# EAGLE board lixie_digit (EAGLE 7.6.0)
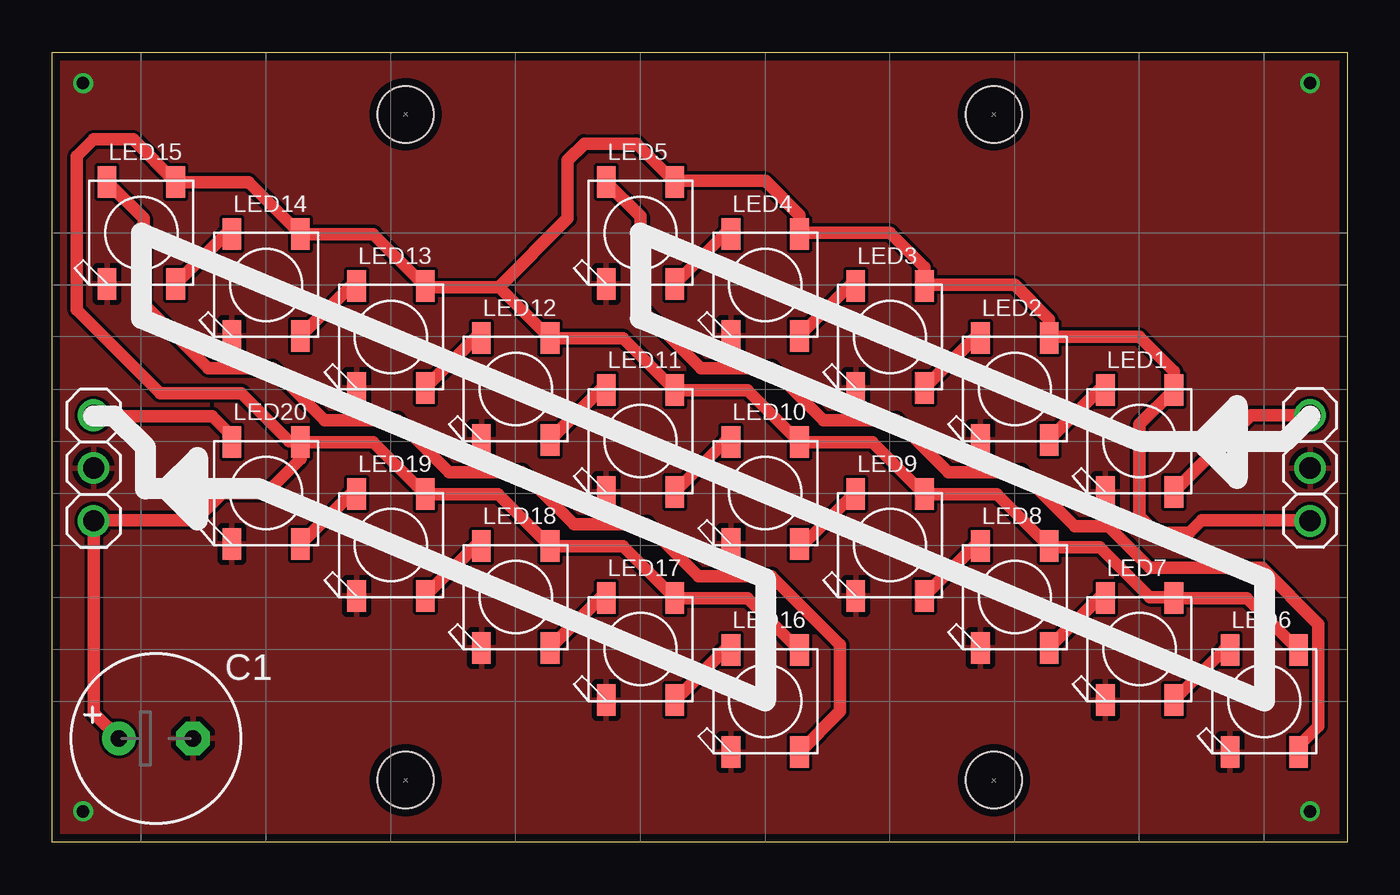
[diagram p0: board, top side]
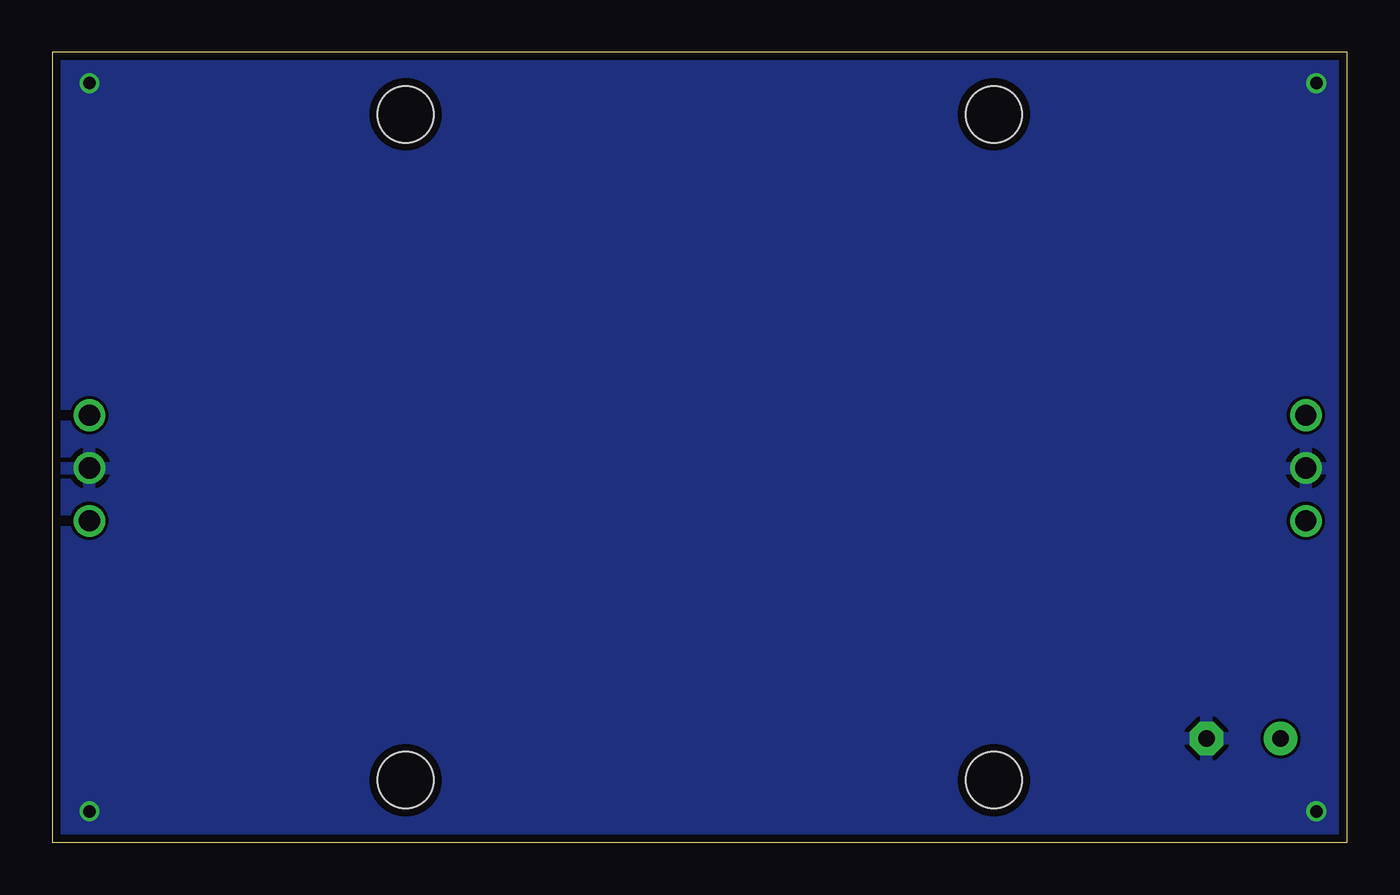
[diagram p1: board, bottom side, seen from below]

Size 62.3 x 38 mm. Coordinates in mm from the lower left corner, seen from the top.
Outline: 0,0 0,38 62.3,38 62.3,0 0,0
Copper layers (1*16): Top 0.0356mm / dielectric 1.5011mm / Bottom 0.0356mm
Design rules "LaenPCBOrder": minimum track width 6mil, minimum drill 13mil, track to track 6mil, track to pad 6mil, pad to pad 6mil, via to via 6mil, smd to smd 6mil, copper to edge 15mil, drill to drill 6mil, minimum pad ring 7mil, minimum via ring 7mil, stop-mask expansion 3mil, vias tented up to drill 0mil, thermal gap 10mil
Holes 2.7 mm at 17,35 45.3,35 45.3,3 17,3

## Footprints (pad centres in the part's own frame; a part is rotated, then mirrored left to right if it is on the bottom)
E3,5-8 = drill 0.813 pad 1.6: + -1.778,0 | drill 0.813 pad 1.6 octagon: - 1.778,0
1X03 = drill 1.016: 1 -2.54,0; 2 0,0; 3 2.54,0
WS2812B = smd 1.5 x 0.9: 1-VDD 2.45,-1.65; 2-DOUT 2.45,1.65; 3-GND -2.45,1.65; 4-DIN -2.45,-1.65

## Placement (x,y rotation side)
C1  [E3,5-8]  5,5 0 top
JP1  [1X03]  60.5,18 270 top
JP2  [1X03]  2,18 90 top
LED1  WS2812B5050  [WS2812B]  52.3,19.3 90 top
LED2  WS2812B5050  [WS2812B]  46.3,21.8 90 top
LED3  WS2812B5050  [WS2812B]  40.3,24.3 90 top
LED4  WS2812B5050  [WS2812B]  34.3,26.8 90 top
LED5  WS2812B5050  [WS2812B]  28.3,29.3 90 top
LED6  WS2812B5050  [WS2812B]  58.3,6.8 90 top
LED7  WS2812B5050  [WS2812B]  52.3,9.3 90 top
LED8  WS2812B5050  [WS2812B]  46.3,11.8 90 top
LED9  WS2812B5050  [WS2812B]  40.3,14.3 90 top
LED10  WS2812B5050  [WS2812B]  34.3,16.8 90 top
LED11  WS2812B5050  [WS2812B]  28.3,19.3 90 top
LED12  WS2812B5050  [WS2812B]  22.3,21.8 90 top
LED13  WS2812B5050  [WS2812B]  16.3,24.3 90 top
LED14  WS2812B5050  [WS2812B]  10.3,26.8 90 top
LED15  WS2812B5050  [WS2812B]  4.3,29.3 90 top
LED16  WS2812B5050  [WS2812B]  34.3,6.8 90 top
LED17  WS2812B5050  [WS2812B]  28.3,9.3 90 top
LED18  WS2812B5050  [WS2812B]  22.3,11.8 90 top
LED19  WS2812B5050  [WS2812B]  16.3,14.3 90 top
LED20  WS2812B5050  [WS2812B]  10.3,16.8 90 top

## Library data of the parts
C1 JP1 JP2 LED1-LED20 = adafruit

## Nets
GND: C1.- JP1.2 JP2.2 LED1.3-GND LED2.3-GND LED3.3-GND LED4.3-GND LED5.3-GND LED6.3-GND LED7.3-GND LED8.3-GND LED9.3-GND LED10.3-GND LED11.3-GND LED12.3-GND LED13.3-GND LED14.3-GND LED15.3-GND LED16.3-GND LED17.3-GND LED18.3-GND LED19.3-GND LED20.3-GND
N$1: LED1.2-DOUT LED2.4-DIN
N$2: LED2.2-DOUT LED3.4-DIN
N$3: LED3.2-DOUT LED4.4-DIN
N$4: LED4.2-DOUT LED5.4-DIN
N$5: LED5.2-DOUT LED6.4-DIN
N$6: LED6.2-DOUT LED7.4-DIN
N$7: LED7.2-DOUT LED8.4-DIN
N$8: LED8.2-DOUT LED9.4-DIN
N$9: LED9.2-DOUT LED10.4-DIN
N$10: LED10.2-DOUT LED11.4-DIN
N$11: LED11.2-DOUT LED12.4-DIN
N$12: LED12.2-DOUT LED13.4-DIN
N$13: LED13.2-DOUT LED14.4-DIN
N$14: LED14.2-DOUT LED15.4-DIN
N$15: LED15.2-DOUT LED16.4-DIN
N$16: LED16.2-DOUT LED17.4-DIN
N$17: LED17.2-DOUT LED18.4-DIN
N$18: LED18.2-DOUT LED19.4-DIN
N$19: LED19.2-DOUT LED20.4-DIN
N$20: C1.+ JP1.3 JP2.1 LED1.1-VDD LED2.1-VDD LED3.1-VDD LED4.1-VDD LED5.1-VDD LED6.1-VDD LED7.1-VDD LED8.1-VDD LED9.1-VDD LED10.1-VDD LED11.1-VDD LED12.1-VDD LED13.1-VDD LED14.1-VDD LED15.1-VDD LED16.1-VDD LED17.1-VDD LED18.1-VDD LED19.1-VDD LED20.1-VDD
N$23: JP1.1 LED1.4-DIN
N$24: JP2.3 LED20.2-DOUT

## Tracks (layer width: path | path; a pad name or v marks a point on that pad's centre or on a via)
GND  (via drill 0.6)
  other vias: 1.5,36.5 60.5,36.5 60.5,1.5 1.5,1.5
  pour Top: 63,-1 -1,-1 -1,39 63,39
  pour Bottom: -1.5,39.5 63.5,39.5 63.5,-1.5 -1.5,-1.5
N$1
  Top 0.61: LED1.2-DOUT 50.35,21.75 LED2.4-DIN
N$2
  Top 0.61: LED2.2-DOUT 44.35,24.25 LED3.4-DIN
N$3
  Top 0.61: LED3.2-DOUT 38.6,26.8 38.4,26.8 LED4.4-DIN
N$4
  Top 0.61: LED4.2-DOUT 32.35,29.25 LED5.4-DIN
N$5
  Top 0.61: LED5.2-DOUT 28.3,30.1 28.3,25.7 31.2,22.8 34.6,22.8 37.1,20.3 40.6,20.3 43.1,17.8 46.6,17.8 49.2,15.2 50.8,15.2 52.8,13.2 58.2,13.2 60.9,10.5 60.9,5.6 59.95,4.65 LED6.4-DIN
N$6
  Top 0.61: LED7.4-DIN 56.35,9.25 LED6.2-DOUT
N$7
  Top 0.61: LED8.4-DIN 50.35,11.75 LED7.2-DOUT
N$8
  Top 0.61: LED9.4-DIN 44.35,14.25 LED8.2-DOUT
N$9
  Top 0.61: LED10.4-DIN 36,14.3 36,14.2 38.55,16.75 LED9.2-DOUT
N$10
  Top 0.61: LED11.4-DIN 32.35,19.25 LED10.2-DOUT
N$11
  Top 0.61: LED12.4-DIN 26.35,21.75 LED11.2-DOUT
N$12
  Top 0.61: LED13.4-DIN 20.35,24.25 LED12.2-DOUT
N$13
  Top 0.61: LED14.4-DIN 14.35,26.75 LED13.2-DOUT
N$14
  Top 0.61: LED15.4-DIN 8.35,29.25 LED14.2-DOUT
N$15
  Top 0.61: LED15.2-DOUT 4.4,30 4.4,25.9 7.5,22.8 10.6,22.8 13.1,20.3 16.6,20.3 19.1,17.8 22.6,17.8 25.1,15.3 28.6,15.3 31.1,12.8 34.6,12.8 37.9,9.5 37.9,6.3 LED16.4-DIN
N$16
  Top 0.61: LED17.4-DIN 32.35,9.25 LED16.2-DOUT
N$17
  Top 0.61: LED18.4-DIN 26.35,11.75 LED17.2-DOUT
N$18
  Top 0.61: LED19.4-DIN 20.35,14.25 LED18.2-DOUT
N$19
  Top 0.61: LED20.4-DIN 14.35,16.75 LED19.2-DOUT
N$20
  Top 0.61: LED6.1-VDD 57.45,11.75 LED7.1-VDD 53.8,11.8 52.8,11.8 50.4,14.2 48,14.2 LED8.1-VDD 45.45,16.75 LED9.1-VDD 39.45,19.25 LED10.1-VDD 33.45,21.75 LED11.1-VDD 27.45,24.25 LED12.1-VDD 21.5,26.7 | 12.05,19.25 LED20.1-VDD 11.95,18.45 10.3,16.8 8.2,16.8 6.9,15.5 2.04,15.5 JP2.1 2,6.22 C1.+ | LED16.1-VDD 33.45,11.75 LED17.1-VDD 27.45,14.25 LED18.1-VDD 21.45,16.75 LED19.1-VDD 15.45,19.25 12.05,19.25 | 21.5,26.7 18,26.7 LED13.1-VDD 15.45,29.25 LED14.1-VDD 9.45,31.75 LED15.1-VDD 3.9,33.8 2,33.8 1.2,33 1.2,25.6 5.2,21.6 9.1,21.6 11.4,19.3 12,19.3 12.05,19.25 | 21.5,26.7 24.8,30 24.8,32.8 25.6,33.6 28.1,33.6 LED5.1-VDD 30,31.8 34.3,31.8 35.95,30.15 LED4.1-VDD 36,29.3 40.3,29.3 41.95,27.65 LED3.1-VDD 42,26.8 46.3,26.8 47.95,25.15 LED2.1-VDD 48,24.3 52.3,24.3 53.95,22.65 LED1.1-VDD 52.3,20.1 52.3,15.7 53.1,14.9 54.7,14.9 55.3,15.5 60.5,15.5 JP1.3
N$23
  Top 0.61: JP1.1 57.64,20.54 LED1.4-DIN
N$24
  Top 0.61: JP2.3 2,20.5 7.7,20.5 8.6,19.6 8.7,19.3 LED20.2-DOUT

## Text on the board
bStop: REV.1 | Designed by / Connor Nishijima | DIN | DOUT | GND | GND | 5V | 5V